# Altium PCB Slave_LHS.PcbDoc (part 1 of 3)
Units mil, origin at the board's own origin, x right, y up, seen from the top; angles counter-clockwise.
Board outline 6000 x 7620.08 mil, 4 copper layers (Top Layer, Int1 (GND), Int2 (PWR), Bottom Layer), stack 53.912 mil thick; 248 components, 191 nets, 688 pads, 143 vias.
Unrouted connection lines stored in the file: 218.
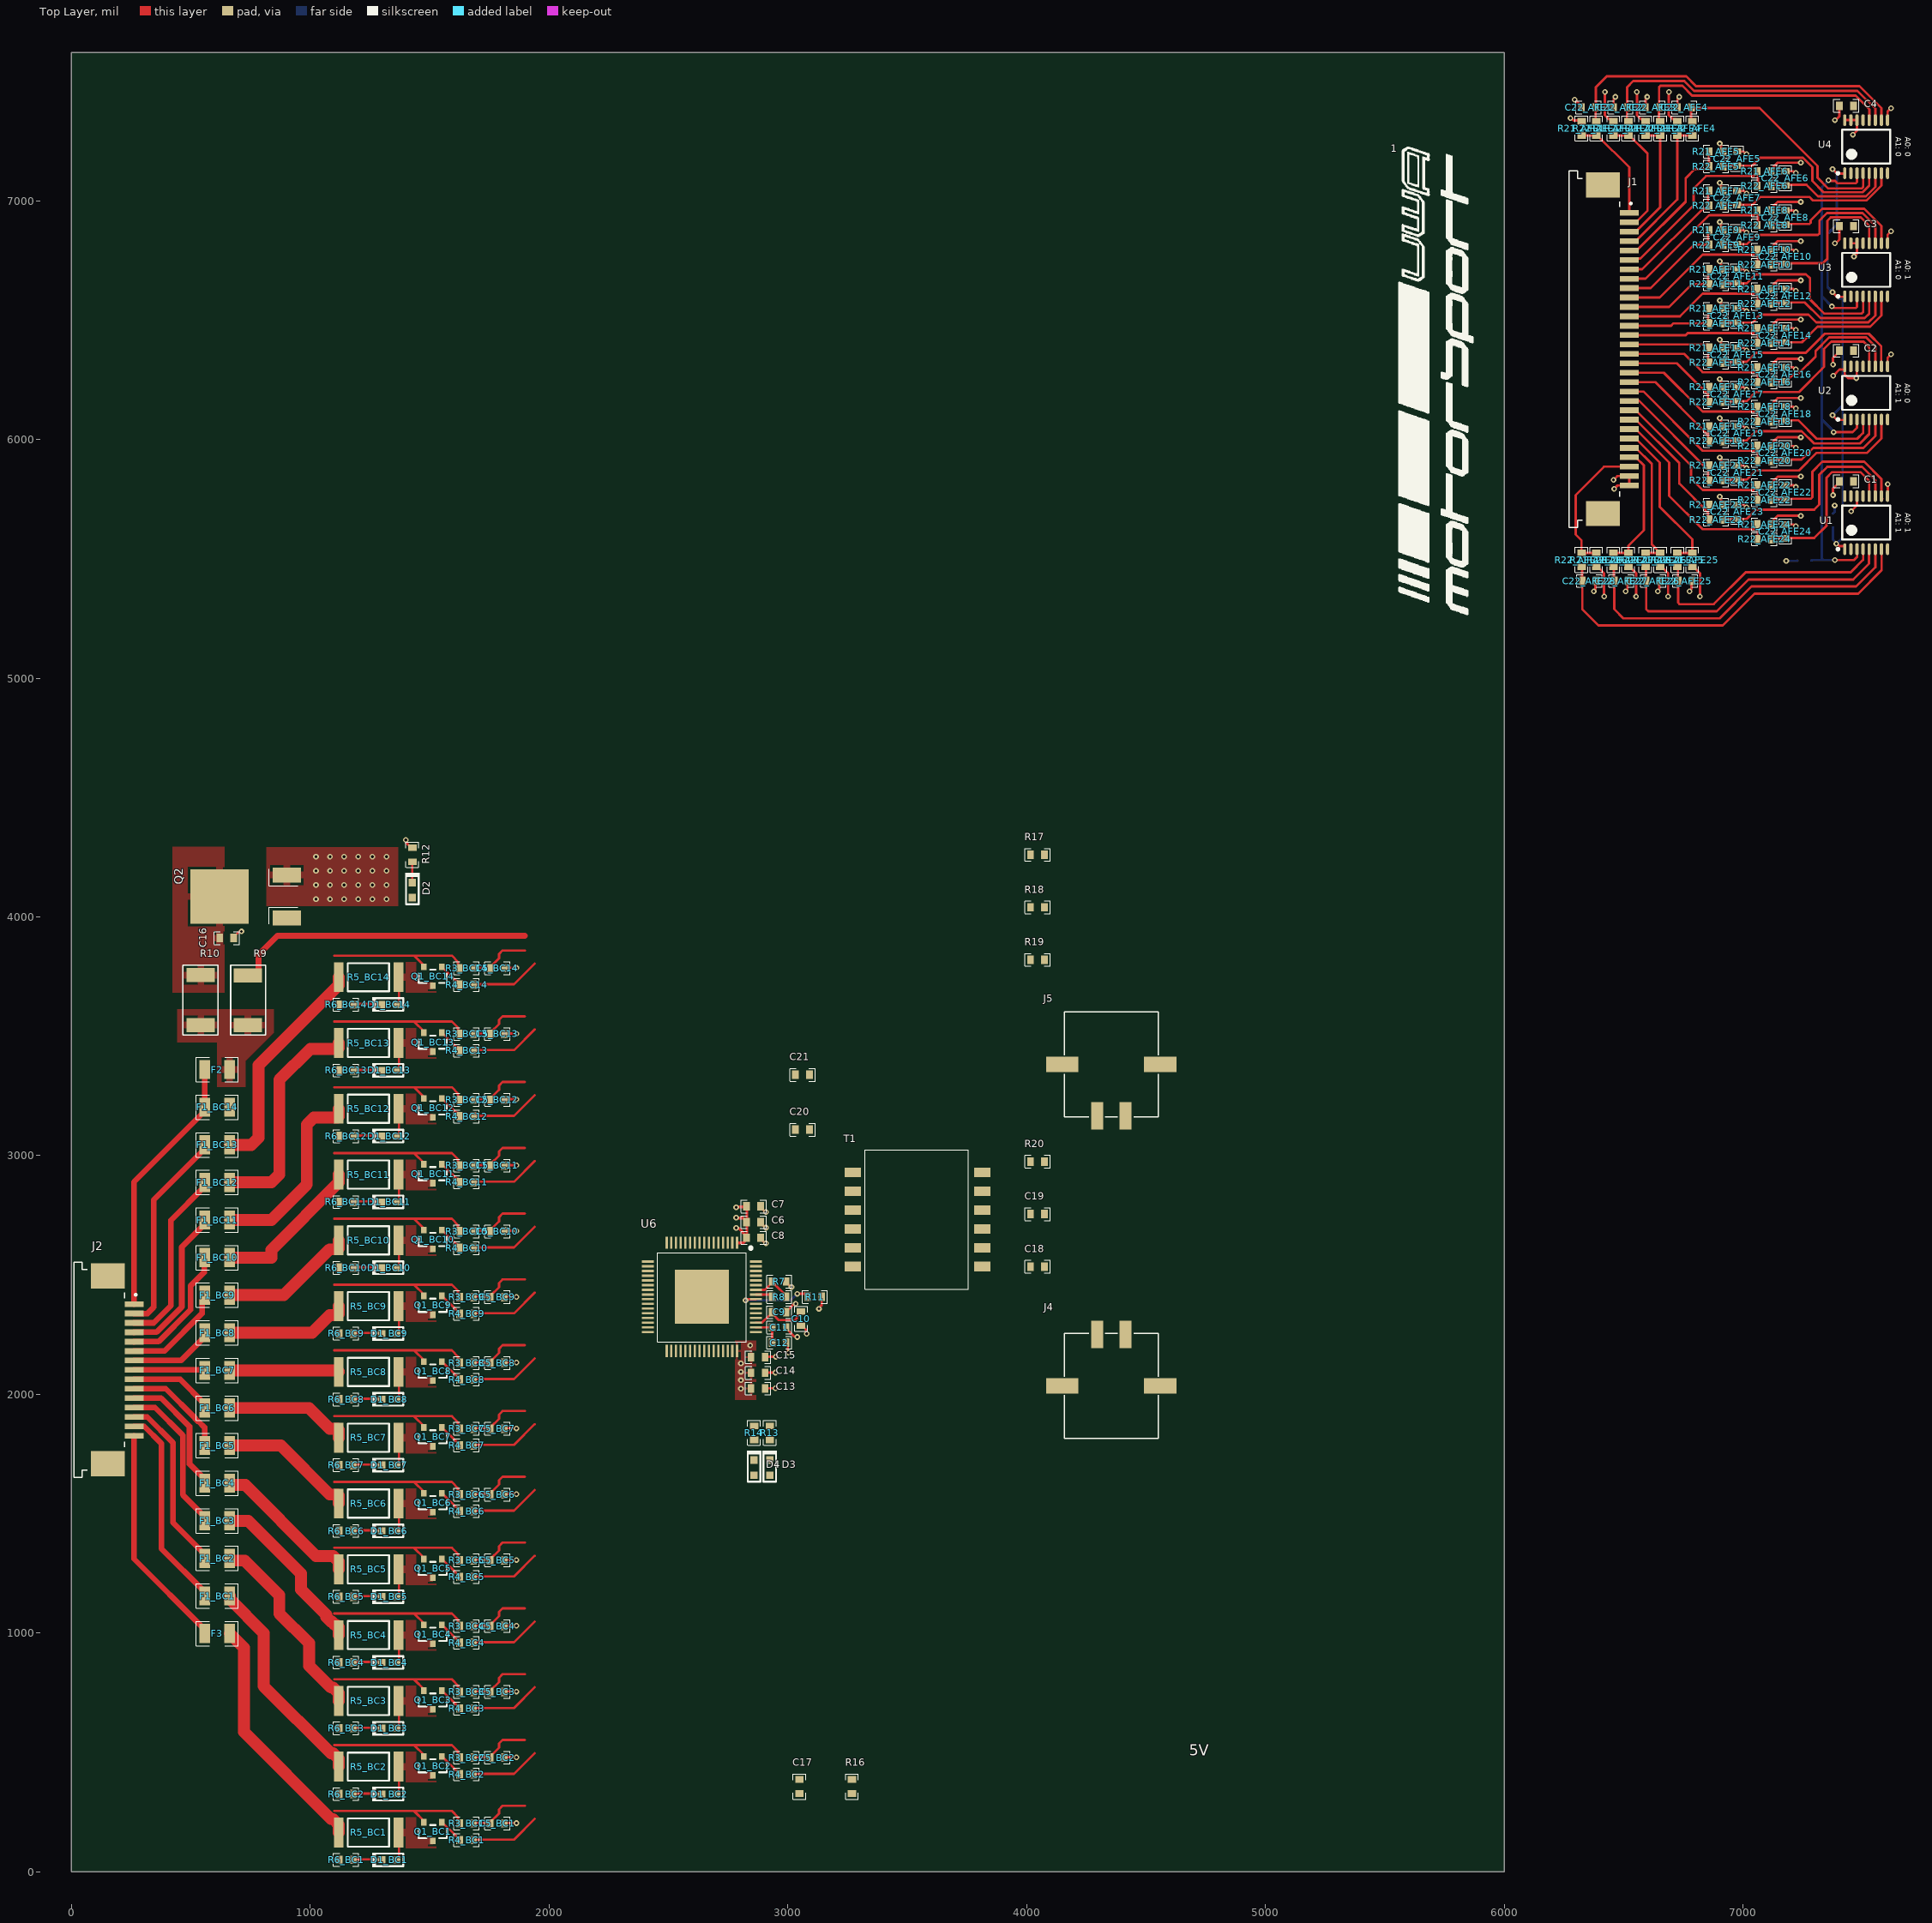
[diagram p0: Top Layer view]
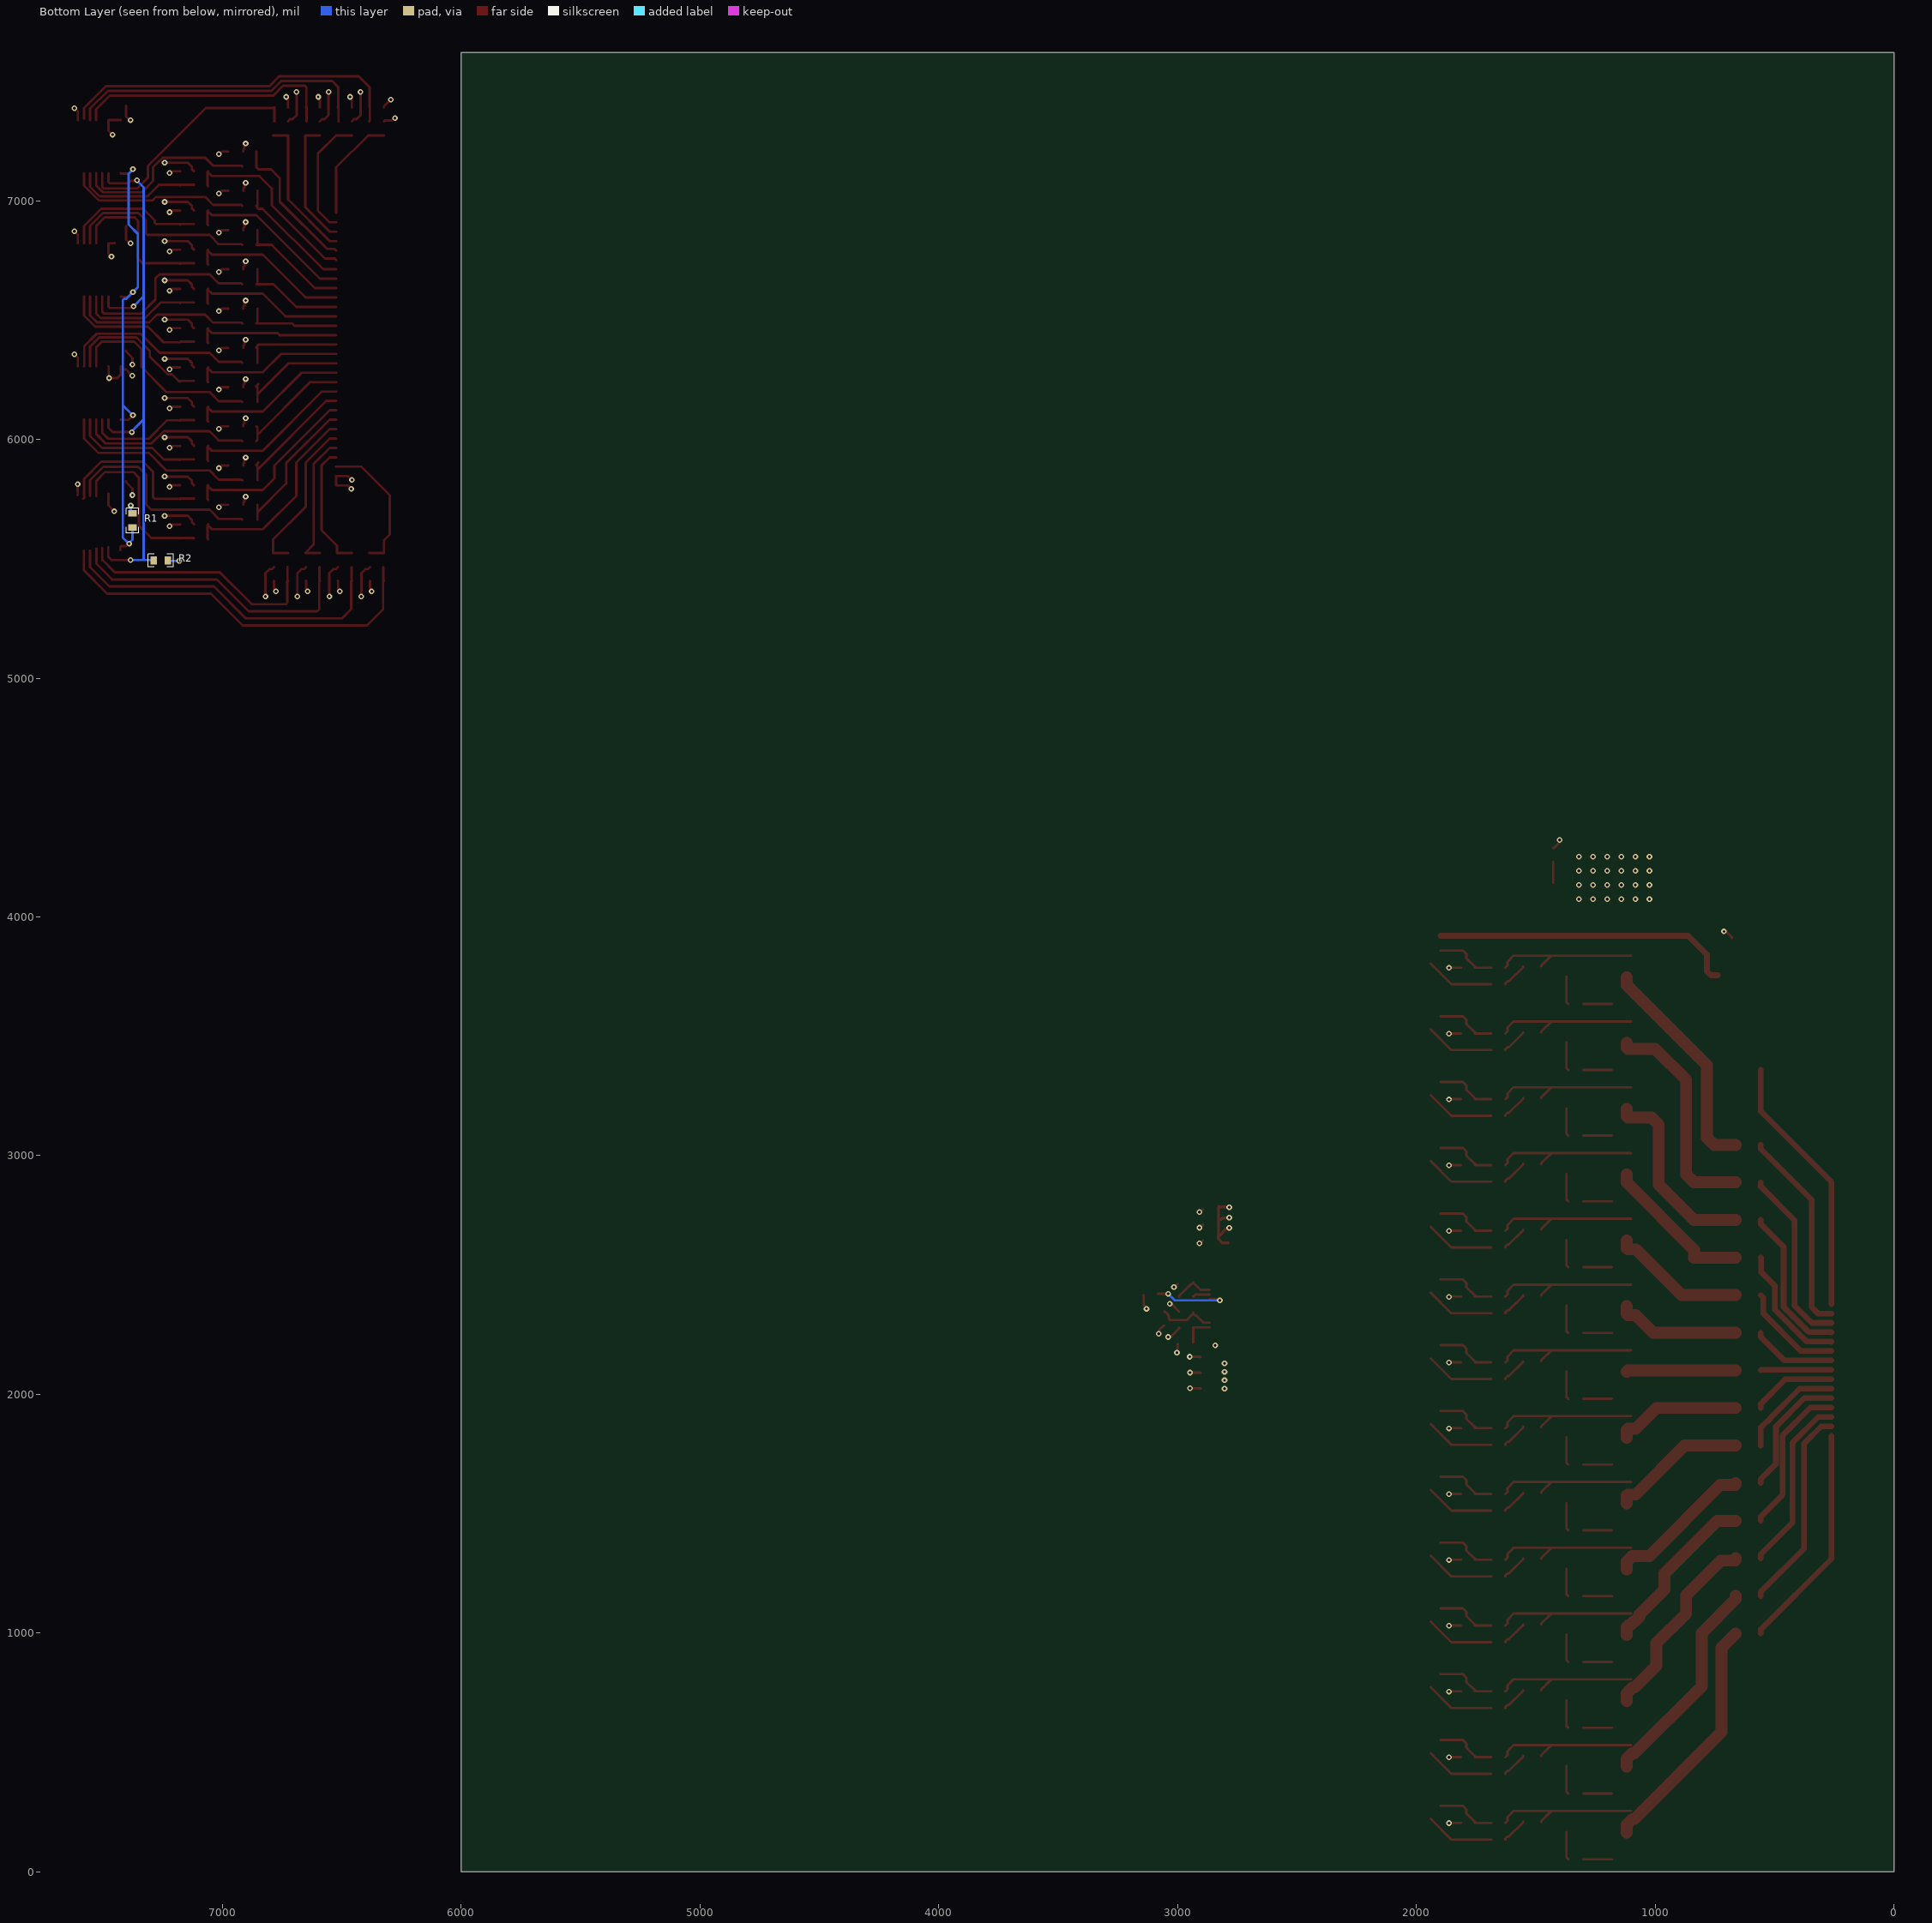
[diagram p1: Bottom Layer view, seen from below]

## Layer stack, top to bottom
Top Solder: solder mask 1, SM-001, Dk 4
Top Layer: signal copper 1.378
Dielectric 1: prepreg 5.1, PP-017, Dk 4.3
Dielectric 2: prepreg 5.1, PP-017, Dk 4.3
Int1 (GND): signal copper 1.378
Dielectric 3: core 28, Core-039, Dk 4.8
Int2 (PWR): signal copper 1.378
Dielectric 4: prepreg 5.1, PP-017, Dk 4.3
Dielectric 5: prepreg 5.1, PP-017, Dk 4.3
Bottom Layer: signal copper 1.378
Bottom Solder: solder mask 1, SM-001, Dk 4

## Board outline
0,0 6000,0 6000,7620.08 0,7620.08

## Design rules (kind name [scope] priority, off if disabled: settings)
BoardOutlineClearance [InNet('No Net')] p1: gap=11.81 ignorepadtopadclearanceinfootprint=FALSE except(0: Text-OutlineEdge Text-CavityEdge Text-CutoutEdge Text-SplitBarrior Text-SplitContinuation)
Clearance PTHTrace [IsTrack vs (OnLayer('Multi-Layer') AND IsPad)] p1: gap=12 ignorepadtopadclearanceinfootprint=FALSE // Prevent ion migration
Clearance GeneralClearance [All] p2: gap=4 ignorepadtopadclearanceinfootprint=FALSE
DiffPairsRouting [All] p1: maxlimit=10 minlimit=10 mostfreqgap=10 toplayer_minwidth=15 toplayer_maxwidth=15 toplayer_prefwidth=15 midlayer1_minwidth=15 midlayer1_maxwidth=15 midlayer1_prefwidth=15 midlayer2_minwidth=15 midlayer2_maxwidth=15 midlayer2_prefwidth=15 bottomlayer_minwidth=15 bottomlayer_maxwidth=15 bottomlayer_prefwidth=15 maxuncoupledlength=500
HoleSize [All] p1: absolutevalues=TRUE maxlimit=196.85 minlimit=11.81 maxpercent=80.000 minpercent=20.000
HoleSize ViaHole [IsVia] p2: absolutevalues=TRUE maxlimit=19.68 minlimit=11.81 maxpercent=80.000 minpercent=20.000
HoleToHoleClearance PTHClearance [(IsPad AND OnLayer('Multi-Layer'))] p1: gap=17.72 allowstackedmicrovias=TRUE
HoleToHoleClearance ViaToViaClearance [IsVia vs IsVia] p2: gap=11.81 allowstackedmicrovias=TRUE
MinimumAnnularRing Via [IsVia] p1: minimumring=3.94
MinimumSolderMaskSliver [All] p1: minsoldermaskwidth=13.78
PolygonConnect "High Current" [(InNetClass('BalanceNetClass') OR InNetClass('CB[14..1]') OR InNet('NetC16_2') OR InComponent('Q2') OR InComponent('F2') OR InComponent('F3') OR InNet('Vin'))] p1: thpad.connectstyle=Relief thpad.reliefconductorwidth=10 thpad.reliefentries=4 thpad.polygonreliefangle="90 Angle" thpad.airgapwidth=10 smdpad.connectstyle=Relief smdpad.reliefconductorwidth=29.53 smdpad.reliefentries=4 smdpad.polygonreliefangle="90 Angle" smdpad.airgapwidth=10 via.connectstyle=Relief via.reliefconductorwidth=10 via.reliefentries=4 via.polygonreliefangle="90 Angle" via.airgapwidth=10
PolygonConnect BasicPolyConnect [All] p2: thpad.connectstyle=Relief thpad.reliefconductorwidth=10 thpad.reliefentries=4 thpad.polygonreliefangle="90 Angle" thpad.airgapwidth=10 smdpad.connectstyle=Relief smdpad.reliefconductorwidth=10 smdpad.reliefentries=4 smdpad.polygonreliefangle="90 Angle" smdpad.airgapwidth=10 via.connectstyle=Direct via.reliefconductorwidth=10 via.reliefentries=4 via.polygonreliefangle="90 Angle" via.airgapwidth=10
RoutingVias [All] p1: holewidth=11.81 width=23.62 viastyle="Through Hole" minholewidth=11.81 minwidth=19.68 maxholewidth=23.62 maxwidth=39.37
SolderMaskExpansion [All] p1: expansion=4 istentingtop=FALSE
Width [All] p1: maxlimit=196.85 minlimit=4 preferedwidth=10
26 further rules are at their usual default settings.

## Classes and differential pairs
net class BalanceNetClass: CB1 CB2 CB3 CB4 CB5 CB6 CB7 CB8 CB9 CB10 CB11 CB12 CB13 CB14 HC2_BC1 HC2_BC2 HC2_BC3 HC2_BC4 HC2_BC5 HC2_BC6 HC2_BC7 HC2_BC8 HC2_BC9 HC2_BC10 HC2_BC11 HC2_BC12 HC2_BC13 HC2_BC14 Top14
differential pair class PRTB: PORTB
differential pair class PRTA: PORTA
differential pair class IB: IB
differential pair class IA: IA
channel class Balance_Circuit: BC1 BC2 BC3 BC4 BC5 BC6 BC7 BC8 BC9 BC10 BC11 BC12 BC13 BC14
channel class AFE: AFE1 AFE2 AFE3 AFE4 AFE5 AFE6 AFE7 AFE8 AFE9 AFE10 AFE11 AFE12 AFE13 AFE14 AFE15 AFE16 AFE17 AFE18 AFE19 AFE20 AFE21 AFE22 AFE23 AFE24 AFE25 AFE26 AFE27 AFE28
net class VTap[14..1]: VTap1 VTap2 VTap3 VTap4 VTap5 VTap6 VTap7 VTap8 VTap9 VTap10 VTap11 VTap12 VTap13 VTap14
net class Top[14..1]: CB2 CB3 CB4 CB5 CB6 CB7 CB8 CB9 CB10 CB11 CB12 CB13 CB14 Top14
net class S[14..1]: S1 S2 S3 S4 S5 S6 S7 S8 S9 S10 S11 S12 S13 S14
net class FPC[28..1]: FPC1 FPC2 FPC3 FPC4 FPC5 FPC6 FPC7 FPC8 FPC9 FPC10 FPC11 FPC12 FPC13 FPC14 FPC15 FPC16 FPC17 FPC18 FPC19 FPC20 FPC21 FPC22 FPC23 FPC24 FPC25 FPC26 FPC27 FPC28
net class CB[14..1]: CB1 CB2 CB3 CB4 CB5 CB6 CB7 CB8 CB9 CB10 CB11 CB12 CB13 CB14
net class C[14..1]: C1 C2 C3 C4 C5 C6 C7 C8 C9 C10 C11 C12 C13 C14
net class ADCIN[28..1]: ADCIN1 ADCIN2 ADCIN3 ADCIN4 ADCIN5 ADCIN6 ADCIN7 ADCIN8 ADCIN9 ADCIN10 ADCIN11 ADCIN12 ADCIN13 ADCIN14 ADCIN15 ADCIN16 ADCIN17 ADCIN18 ADCIN19 ADCIN20 ADCIN21 ADCIN22 ADCIN23 ADCIN24 ADCIN25 ADCIN26 ADCIN27 ADCIN28
component class Thermistor_ADC: C1 C2 C3 C4 J1 R1 R2 U1 U2 U3 U4
component class IsoSPI: C18 C19 C20 C21 J4 J5 R17 R18 R19 R20 T1
component class HV_BMS_Slave: 1 MH1 MH2 MH3 MH4 MH5 MH6 MH7 MH8
component class BMS_IC: C6 C7 C8 C9 C10 C11 C12 C13 C14 C15 C16 C17 D2 D3 D4 F2 F3 J2 Q2 R7 R8 R9 R10 R11 R12 R13 R14 R16 U6
component class BC14: C5_BC14 D1_BC14 F1_BC14 Q1_BC14 R3_BC14 R4_BC14 R5_BC14 R6_BC14
component class BC13: C5_BC13 D1_BC13 F1_BC13 Q1_BC13 R3_BC13 R4_BC13 R5_BC13 R6_BC13
component class BC12: C5_BC12 D1_BC12 F1_BC12 Q1_BC12 R3_BC12 R4_BC12 R5_BC12 R6_BC12
component class BC11: C5_BC11 D1_BC11 F1_BC11 Q1_BC11 R3_BC11 R4_BC11 R5_BC11 R6_BC11
component class BC10: C5_BC10 D1_BC10 F1_BC10 Q1_BC10 R3_BC10 R4_BC10 R5_BC10 R6_BC10
component class BC9: C5_BC9 D1_BC9 F1_BC9 Q1_BC9 R3_BC9 R4_BC9 R5_BC9 R6_BC9
component class BC8: C5_BC8 D1_BC8 F1_BC8 Q1_BC8 R3_BC8 R4_BC8 R5_BC8 R6_BC8
component class BC7: C5_BC7 D1_BC7 F1_BC7 Q1_BC7 R3_BC7 R4_BC7 R5_BC7 R6_BC7
component class BC6: C5_BC6 D1_BC6 F1_BC6 Q1_BC6 R3_BC6 R4_BC6 R5_BC6 R6_BC6
component class BC5: C5_BC5 D1_BC5 F1_BC5 Q1_BC5 R3_BC5 R4_BC5 R5_BC5 R6_BC5
component class BC4: C5_BC4 D1_BC4 F1_BC4 Q1_BC4 R3_BC4 R4_BC4 R5_BC4 R6_BC4
component class BC3: C5_BC3 D1_BC3 F1_BC3 Q1_BC3 R3_BC3 R4_BC3 R5_BC3 R6_BC3
component class BC2: C5_BC2 D1_BC2 F1_BC2 Q1_BC2 R3_BC2 R4_BC2 R5_BC2 R6_BC2
component class BC1: C5_BC1 D1_BC1 F1_BC1 Q1_BC1 R3_BC1 R4_BC1 R5_BC1 R6_BC1
component class AFE28: C22_AFE28 R21_AFE28 R22_AFE28
component class AFE27: C22_AFE27 R21_AFE27 R22_AFE27
component class AFE26: C22_AFE26 R21_AFE26 R22_AFE26
component class AFE25: C22_AFE25 R21_AFE25 R22_AFE25
component class AFE24: C22_AFE24 R21_AFE24 R22_AFE24
component class AFE23: C22_AFE23 R21_AFE23 R22_AFE23
component class AFE22: C22_AFE22 R21_AFE22 R22_AFE22
component class AFE21: C22_AFE21 R21_AFE21 R22_AFE21
component class AFE20: C22_AFE20 R21_AFE20 R22_AFE20
component class AFE19: C22_AFE19 R21_AFE19 R22_AFE19
component class AFE18: C22_AFE18 R21_AFE18 R22_AFE18
component class AFE17: C22_AFE17 R21_AFE17 R22_AFE17
component class AFE16: C22_AFE16 R21_AFE16 R22_AFE16
component class AFE15: C22_AFE15 R21_AFE15 R22_AFE15
component class AFE14: C22_AFE14 R21_AFE14 R22_AFE14
component class AFE13: C22_AFE13 R21_AFE13 R22_AFE13
component class AFE12: C22_AFE12 R21_AFE12 R22_AFE12
component class AFE11: C22_AFE11 R21_AFE11 R22_AFE11
component class AFE10: C22_AFE10 R21_AFE10 R22_AFE10
component class AFE9: C22_AFE9 R21_AFE9 R22_AFE9
component class AFE8: C22_AFE8 R21_AFE8 R22_AFE8
component class AFE7: C22_AFE7 R21_AFE7 R22_AFE7
component class AFE6: C22_AFE6 R21_AFE6 R22_AFE6
component class AFE5: C22_AFE5 R21_AFE5 R22_AFE5
component class AFE4: C22_AFE4 R21_AFE4 R22_AFE4
component class AFE3: C22_AFE3 R21_AFE3 R22_AFE3
component class AFE2: C22_AFE2 R21_AFE2 R22_AFE2
component class AFE1: C22_AFE1 R21_AFE1 R22_AFE1
differential pair PORTB: +PORTB_P -PORTB_N
differential pair PORTA: +PORTA_P -PORTA_N
differential pair IB: +IB_P -IB_N
differential pair IA: +IA_P -IA_N

## Components (designator, comment, footprint, x,y, rotation, side; value= is the part's Value field where it differs from the comment)
1 "UWAM Logo" "UWAM Logo" 5639.76,6210.63 r90 top
C1 "C" C_0603 7403.54,5824.8 r0 top value=0.1uF
C2 "C" C_0603 7403.54,6372.05 r0 top value=0.1uF
C3 "C" C_0603 7403.54,6893.7 r0 top value=0.1uF
C4 "C" C_0603 7403.54,7397.64 r0 top value=0.1uF
C5_BC1 "C" C_0603 1812.01,202.76 r180 top value=10nF (schematic designator C5)
C5_BC2 "C" C_0603 1812.01,478.35 r180 top value=10nF (schematic designator C5)
C5_BC3 "C" C_0603 1812.01,753.94 r180 top value=10nF (schematic designator C5)
C5_BC4 "C" C_0603 1812.01,1029.53 r180 top value=10nF (schematic designator C5)
C5_BC5 "C" C_0603 1812.01,1305.12 r180 top value=10nF (schematic designator C5)
C5_BC6 "C" C_0603 1812.01,1580.71 r180 top value=10nF (schematic designator C5)
C5_BC7 "C" C_0603 1812.01,1856.3 r180 top value=10nF (schematic designator C5)
C5_BC8 "C" C_0603 1812.01,2131.89 r180 top value=10nF (schematic designator C5)
C5_BC9 "C" C_0603 1812.01,2407.48 r180 top value=10nF (schematic designator C5)
C5_BC10 "C" C_0603 1812.01,2683.07 r180 top value=10nF (schematic designator C5)
C5_BC11 "C" C_0603 1812.01,2958.66 r180 top value=10nF (schematic designator C5)
C5_BC12 "C" C_0603 1812.01,3234.25 r180 top value=10nF (schematic designator C5)
C5_BC13 "C" C_0603 1812.01,3509.84 r180 top value=10nF (schematic designator C5)
C5_BC14 "C" C_0603 1812.01,3785.43 r180 top value=10nF (schematic designator C5)
C6 "C" C_0603 2885.83,2721.5 r180 top value=4.7uF
C7 "C" C_0603 2885.83,2787.4 r180 top value=100nF
C8 "C" C_0603 2885.83,2655.59 r180 top value=10uF
C9 "C" C_0603 2993.11,2344.49 r180 top value=1uF
C10 "C" C_0603 3055.12,2287.4 r90 top value=100nF
C11 "C" C_0603 2993.11,2280.51 r180 top value=1uF
C12 "C" C_0603 2993.11,2216.54 r180 top value=100nF
C13 "C" C_0603 2904.45,2024.68 r180 top value=10uF
C14 "C" C_0603 2904.45,2090.14 r180 top value=4.7uF
C15 "C" C_0603 2904.45,2155.59 r180 top value=100nF
C16 "C" C_0603 679.13,3911.42 r180 top value=1uF
C17 "C" C_0603 3048.54,327.83 r90 top value=10nF
C18 "C" C_0603 4074.8,2535.04 r180 top value=10nF
C19 "C" C_0603 4074.8,2755.04 r180 top value=10nF
C20 "C" C_0603 3090.55,3108.58 r180 top value=10nF
C21 "C" C_0603 3090.55,3338.58 r180 top value=10nF
C22_AFE1 "C" C_0603 6323.82,7390.75 r0 top value=10nF (schematic designator C22)
C22_AFE2 "C" C_0603 6457.68,7390.75 r0 top value=10nF (schematic designator C22)
C22_AFE3 "C" C_0603 6591.54,7390.75 r0 top value=10nF (schematic designator C22)
C22_AFE4 "C" C_0603 6725.39,7390.75 r0 top value=10nF (schematic designator C22)
C22_AFE5 "C" C_0603 6975.39,7205.71 r270 top value=10nF (schematic designator C22)
C22_AFE6 "C" C_0603 7177.17,7123.52 r270 top value=10nF (schematic designator C22)
C22_AFE7 "C" C_0603 6975.39,7041.34 r270 top value=10nF (schematic designator C22)
C22_AFE8 "C" C_0603 7177.17,6959.15 r270 top value=10nF (schematic designator C22)
C22_AFE9 "C" C_0603 6975.39,6876.97 r270 top value=10nF (schematic designator C22)
C22_AFE10 "C" C_0603 7177.17,6794.78 r270 top value=10nF (schematic designator C22)
C22_AFE11 "C" C_0603 6975.39,6712.6 r270 top value=10nF (schematic designator C22)
C22_AFE12 "C" C_0603 7177.17,6630.41 r270 top value=10nF (schematic designator C22)
C22_AFE13 "C" C_0603 6975.39,6548.23 r270 top value=10nF (schematic designator C22)
C22_AFE14 "C" C_0603 7177.17,6466.04 r270 top value=10nF (schematic designator C22)
C22_AFE15 "C" C_0603 6975.39,6383.86 r270 top value=10nF (schematic designator C22)
C22_AFE16 "C" C_0603 7177.17,6301.67 r270 top value=10nF (schematic designator C22)
C22_AFE17 "C" C_0603 6975.39,6219.49 r270 top value=10nF (schematic designator C22)
C22_AFE18 "C" C_0603 7177.17,6137.3 r270 top value=10nF (schematic designator C22)
C22_AFE19 "C" C_0603 6975.39,6055.12 r270 top value=10nF (schematic designator C22)
C22_AFE20 "C" C_0603 7177.17,5972.93 r270 top value=10nF (schematic designator C22)
C22_AFE21 "C" C_0603 6975.39,5890.75 r270 top value=10nF (schematic designator C22)
C22_AFE22 "C" C_0603 7177.17,5808.56 r270 top value=10nF (schematic designator C22)
C22_AFE23 "C" C_0603 6975.39,5726.38 r270 top value=10nF (schematic designator C22)
C22_AFE24 "C" C_0603 7177.17,5644.19 r270 top value=10nF (schematic designator C22)
C22_AFE25 "C" C_0603 6787.4,5407.48 r180 top value=10nF (schematic designator C22)
C22_AFE26 "C" C_0603 6653.54,5407.48 r180 top value=10nF (schematic designator C22)
C22_AFE27 "C" C_0603 6519.69,5407.48 r180 top value=10nF (schematic designator C22)
C22_AFE28 "C" C_0603 6385.83,5407.48 r180 top value=10nF (schematic designator C22)
D1_BC1 "150060BS55040" "LED (0603)" 1330.2,50.2 r0 top (schematic designator D1)
D1_BC2 "150060BS55040" "LED (0603)" 1330.2,325.79 r0 top (schematic designator D1)
D1_BC3 "150060BS55040" "LED (0603)" 1330.2,601.38 r0 top (schematic designator D1)
D1_BC4 "150060BS55040" "LED (0603)" 1330.2,876.97 r0 top (schematic designator D1)
D1_BC5 "150060BS55040" "LED (0603)" 1330.2,1152.56 r0 top (schematic designator D1)
D1_BC6 "150060BS55040" "LED (0603)" 1330.2,1428.15 r0 top (schematic designator D1)
D1_BC7 "150060BS55040" "LED (0603)" 1330.2,1703.74 r0 top (schematic designator D1)
D1_BC8 "150060BS55040" "LED (0603)" 1330.2,1979.33 r0 top (schematic designator D1)
D1_BC9 "150060BS55040" "LED (0603)" 1330.2,2254.92 r0 top (schematic designator D1)
D1_BC10 "150060BS55040" "LED (0603)" 1330.2,2530.51 r0 top (schematic designator D1)
D1_BC11 "150060BS55040" "LED (0603)" 1330.2,2806.1 r0 top (schematic designator D1)
D1_BC12 "150060BS55040" "LED (0603)" 1330.2,3081.69 r0 top (schematic designator D1)
D1_BC13 "150060BS55040" "LED (0603)" 1330.2,3357.28 r0 top (schematic designator D1)
D1_BC14 "150060BS55040" "LED (0603)" 1330.2,3632.87 r0 top (schematic designator D1)
D2 "150060SS55040" "LED (0603)" 1427.17,4112.2 r270 top
D3 "150060BS55040" "LED (0603)" 2924.21,1692.91 r270 top
D4 "150060GS55040" "LED (0603)" 2858.27,1692.91 r270 top
F1_BC1 "0466.500NR" 0466.500NR 557.09,1155.51 r270 top (schematic designator F1)
F1_BC2 "0466.500NR" 0466.500NR 557.09,1312.99 r270 top (schematic designator F1)
F1_BC3 "0466.500NR" 0466.500NR 557.09,1470.47 r270 top (schematic designator F1)
F1_BC4 "0466.500NR" 0466.500NR 557.09,1627.95 r270 top (schematic designator F1)
F1_BC5 "0466.500NR" 0466.500NR 557.09,1785.43 r270 top (schematic designator F1)
F1_BC6 "0466.500NR" 0466.500NR 557.09,1942.91 r270 top (schematic designator F1)
F1_BC7 "0466.500NR" 0466.500NR 557.09,2100.39 r270 top (schematic designator F1)
F1_BC8 "0466.500NR" 0466.500NR 557.09,2257.87 r270 top (schematic designator F1)
F1_BC9 "0466.500NR" 0466.500NR 557.09,2415.35 r270 top (schematic designator F1)
F1_BC10 "0466.500NR" 0466.500NR 557.09,2572.83 r270 top (schematic designator F1)
F1_BC11 "0466.500NR" 0466.500NR 557.09,2730.31 r270 top (schematic designator F1)
F1_BC12 "0466.500NR" 0466.500NR 557.09,2887.8 r270 top (schematic designator F1)
F1_BC13 "0466.500NR" 0466.500NR 557.09,3045.28 r270 top (schematic designator F1)
F1_BC14 "0466.500NR" 0466.500NR 557.09,3202.76 r270 top (schematic designator F1)
F2 "0466.500NR" 0466.500NR 557.09,3360.24 r270 top
F3 "0466.500NR" 0466.500NR 557.09,998.03 r270 top
J1 "3-84953-0" 3-84953-0 6523.62,6377.95 r270 top
J2 "1-84953-5" 1-84953-5 261.81,2102.36 r270 top
J4 "2-1445057-2" TE_2-1445057-2 4354.33,2035.43 r0 top
J5 "2-1445057-2" TE_2-1445057-2 4354.33,3381.89 r180 top
Q1_BC1 "NX2301P,215" FP-SOT23-MFG 1512.8,168.31 r270 top (schematic designator Q1)
Q1_BC2 "NX2301P,215" FP-SOT23-MFG 1512.8,443.9 r270 top (schematic designator Q1)
Q1_BC3 "NX2301P,215" FP-SOT23-MFG 1512.8,719.49 r270 top (schematic designator Q1)
Q1_BC4 "NX2301P,215" FP-SOT23-MFG 1512.8,995.08 r270 top (schematic designator Q1)
Q1_BC5 "NX2301P,215" FP-SOT23-MFG 1512.8,1270.67 r270 top (schematic designator Q1)
Q1_BC6 "NX2301P,215" FP-SOT23-MFG 1512.8,1546.26 r270 top (schematic designator Q1)
Q1_BC7 "NX2301P,215" FP-SOT23-MFG 1512.8,1821.85 r270 top (schematic designator Q1)
Q1_BC8 "NX2301P,215" FP-SOT23-MFG 1512.8,2097.44 r270 top (schematic designator Q1)
Q1_BC9 "NX2301P,215" FP-SOT23-MFG 1512.8,2373.03 r270 top (schematic designator Q1)
Q1_BC10 "NX2301P,215" FP-SOT23-MFG 1512.8,2648.62 r270 top (schematic designator Q1)
Q1_BC11 "NX2301P,215" FP-SOT23-MFG 1512.8,2924.21 r270 top (schematic designator Q1)
Q1_BC12 "NX2301P,215" FP-SOT23-MFG 1512.8,3199.8 r270 top (schematic designator Q1)
Q1_BC13 "NX2301P,215" FP-SOT23-MFG 1512.8,3475.39 r270 top (schematic designator Q1)
Q1_BC14 "NX2301P,215" FP-SOT23-MFG 1512.8,3750.98 r270 top (schematic designator Q1)
Q2 "MJD340G" TO-252-3 901.77,3995.67 r0 top
R1 "Resistor" R-0603 7376.97,5630.91 r90 bottom value=2k
R2 "Resistor" R-0603 7287.4,5493.11 r180 bottom value=2k
R3_BC1 "Resistor" R-0603 1625,202.76 r0 top value=100 (schematic designator R3)
R3_BC2 "Resistor" R-0603 1625,478.35 r0 top value=100 (schematic designator R3)
R3_BC3 "Resistor" R-0603 1625,753.94 r0 top value=100 (schematic designator R3)
R3_BC4 "Resistor" R-0603 1625,1029.53 r0 top value=100 (schematic designator R3)
R3_BC5 "Resistor" R-0603 1625,1305.12 r0 top value=100 (schematic designator R3)
R3_BC6 "Resistor" R-0603 1625,1580.71 r0 top value=100 (schematic designator R3)
R3_BC7 "Resistor" R-0603 1625,1856.3 r0 top value=100 (schematic designator R3)
R3_BC8 "Resistor" R-0603 1625,2131.89 r0 top value=100 (schematic designator R3)
R3_BC9 "Resistor" R-0603 1625,2407.48 r0 top value=100 (schematic designator R3)
R3_BC10 "Resistor" R-0603 1625,2683.07 r0 top value=100 (schematic designator R3)
R3_BC11 "Resistor" R-0603 1625,2958.66 r0 top value=100 (schematic designator R3)
R3_BC12 "Resistor" R-0603 1625,3234.25 r0 top value=100 (schematic designator R3)
R3_BC13 "Resistor" R-0603 1625,3509.84 r0 top value=100 (schematic designator R3)
R3_BC14 "Resistor" R-0603 1625,3785.43 r0 top value=100 (schematic designator R3)
R4_BC1 "Resistor" R-0603 1625,132.87 r0 top value=3k3 (schematic designator R4)
R4_BC2 "Resistor" R-0603 1625,408.46 r0 top value=3k3 (schematic designator R4)
R4_BC3 "Resistor" R-0603 1625,684.06 r0 top value=3k3 (schematic designator R4)
R4_BC4 "Resistor" R-0603 1625,959.65 r0 top value=3k3 (schematic designator R4)
R4_BC5 "Resistor" R-0603 1625,1235.24 r0 top value=3k3 (schematic designator R4)
R4_BC6 "Resistor" R-0603 1625,1510.83 r0 top value=3k3 (schematic designator R4)
R4_BC7 "Resistor" R-0603 1625,1786.42 r0 top value=3k3 (schematic designator R4)
R4_BC8 "Resistor" R-0603 1625,2062.01 r0 top value=3k3 (schematic designator R4)
R4_BC9 "Resistor" R-0603 1625,2337.6 r0 top value=3k3 (schematic designator R4)
R4_BC10 "Resistor" R-0603 1625,2613.19 r0 top value=3k3 (schematic designator R4)
R4_BC11 "Resistor" R-0603 1625,2888.78 r0 top value=3k3 (schematic designator R4)
R4_BC12 "Resistor" R-0603 1625,3164.37 r0 top value=3k3 (schematic designator R4)
R4_BC13 "Resistor" R-0603 1625,3439.96 r0 top value=3k3 (schematic designator R4)
R4_BC14 "Resistor" R-0603 1625,3715.55 r0 top value=3k3 (schematic designator R4)
R5_BC1 "CRCW251221R0FKEGHP" R_2512 1369.09,164.68 r180 top value=21 (schematic designator R5)
R5_BC2 "CRCW251221R0FKEGHP" R_2512 1369.09,440.28 r180 top value=21 (schematic designator R5)
R5_BC3 "CRCW251221R0FKEGHP" R_2512 1369.09,715.87 r180 top value=21 (schematic designator R5)
R5_BC4 "CRCW251221R0FKEGHP" R_2512 1369.09,991.46 r180 top value=21 (schematic designator R5)
R5_BC5 "CRCW251221R0FKEGHP" R_2512 1369.09,1267.05 r180 top value=21 (schematic designator R5)
R5_BC6 "CRCW251221R0FKEGHP" R_2512 1369.09,1542.64 r180 top value=21 (schematic designator R5)
R5_BC7 "CRCW251221R0FKEGHP" R_2512 1369.09,1818.23 r180 top value=21 (schematic designator R5)
R5_BC8 "CRCW251221R0FKEGHP" R_2512 1369.09,2093.82 r180 top value=21 (schematic designator R5)
R5_BC9 "CRCW251221R0FKEGHP" R_2512 1369.09,2369.41 r180 top value=21 (schematic designator R5)
R5_BC10 "CRCW251221R0FKEGHP" R_2512 1369.09,2645 r180 top value=21 (schematic designator R5)
R5_BC11 "CRCW251221R0FKEGHP" R_2512 1369.09,2920.59 r180 top value=21 (schematic designator R5)
R5_BC12 "CRCW251221R0FKEGHP" R_2512 1369.09,3196.18 r180 top value=21 (schematic designator R5)
R5_BC13 "CRCW251221R0FKEGHP" R_2512 1369.09,3471.77 r180 top value=21 (schematic designator R5)
R5_BC14 "CRCW251221R0FKEGHP" R_2512 1369.09,3747.36 r180 top value=21 (schematic designator R5)
R6_BC1 "RT0603DRE07583RL" R-0603 1120.59,50.2 r0 top value=583 (schematic designator R6)
R6_BC2 "RT0603DRE07583RL" R-0603 1120.59,325.79 r0 top value=583 (schematic designator R6)
R6_BC3 "RT0603DRE07583RL" R-0603 1120.59,601.38 r0 top value=583 (schematic designator R6)
R6_BC4 "RT0603DRE07583RL" R-0603 1120.59,876.97 r0 top value=583 (schematic designator R6)
R6_BC5 "RT0603DRE07583RL" R-0603 1120.59,1152.56 r0 top value=583 (schematic designator R6)
R6_BC6 "RT0603DRE07583RL" R-0603 1120.59,1428.15 r0 top value=583 (schematic designator R6)
R6_BC7 "RT0603DRE07583RL" R-0603 1120.59,1703.74 r0 top value=583 (schematic designator R6)
R6_BC8 "RT0603DRE07583RL" R-0603 1120.59,1979.33 r0 top value=583 (schematic designator R6)
R6_BC9 "RT0603DRE07583RL" R-0603 1120.59,2254.92 r0 top value=583 (schematic designator R6)
R6_BC10 "RT0603DRE07583RL" R-0603 1120.59,2530.51 r0 top value=583 (schematic designator R6)
R6_BC11 "RT0603DRE07583RL" R-0603 1120.59,2806.1 r0 top value=583 (schematic designator R6)
R6_BC12 "RT0603DRE07583RL" R-0603 1120.59,3081.69 r0 top value=583 (schematic designator R6)
R6_BC13 "RT0603DRE07583RL" R-0603 1120.59,3357.28 r0 top value=583 (schematic designator R6)
R6_BC14 "RT0603DRE07583RL" R-0603 1120.59,3632.87 r0 top value=583 (schematic designator R6)
R7 "Resistor" R-0603 2993.11,2472.44 r180 top value=1.21k
R8 "RB1" R-0603 2993.11,2408.46 r180 top value=2.8k
R9 "ERJ-12ZYJ101U" R_2010 738.19,3650.59 r90 top value=100
R10 "ERJ-12ZYJ101U" R_2010 541.34,3651.57 r270 top value=100
R11 "Resistor" R-0603 3141.73,2408.46 r180 top value=1M
R12 "Resistor" R-0603 1427.17,4289.37 r270 top value=1k
R13 "Resistor" R-0603 2924.22,1868.11 r270 top value=1k
R14 "Resistor" R-0603 2858.27,1868.11 r270 top value=1k
R16 "Resistor" R-0603 3268.54,327.83 r90 top value=100
R17 "Resistor" R-0603 4074.8,4260.04 r180 top value=51
R18 "Resistor" R-0603 4074.8,4040.04 r180 top value=51
R19 "Resistor" R-0603 4074.8,3820.04 r180 top value=51
R20 "Resistor" R-0603 4074.8,2975.04 r180 top value=51
R21_AFE1 "CRT0603-BY-1002EST" R-0603 6323.82,7273.62 r90 top value=10k (schematic designator R21)
R21_AFE2 "CRT0603-BY-1002EST" R-0603 6457.68,7273.62 r90 top value=10k (schematic designator R21)
R21_AFE3 "CRT0603-BY-1002EST" R-0603 6591.54,7273.62 r90 top value=10k (schematic designator R21)
R21_AFE4 "CRT0603-BY-1002EST" R-0603 6725.39,7273.62 r90 top value=10k (schematic designator R21)
R21_AFE5 "CRT0603-BY-1002EST" R-0603 6858.27,7205.71 r0 top value=10k (schematic designator R21)
R21_AFE6 "CRT0603-BY-1002EST" R-0603 7060.04,7123.52 r0 top value=10k (schematic designator R21)
R21_AFE7 "CRT0603-BY-1002EST" R-0603 6858.27,7041.34 r0 top value=10k (schematic designator R21)
R21_AFE8 "CRT0603-BY-1002EST" R-0603 7060.04,6959.15 r0 top value=10k (schematic designator R21)
R21_AFE9 "CRT0603-BY-1002EST" R-0603 6858.27,6876.97 r0 top value=10k (schematic designator R21)
R21_AFE10 "CRT0603-BY-1002EST" R-0603 7060.04,6794.78 r0 top value=10k (schematic designator R21)
R21_AFE11 "CRT0603-BY-1002EST" R-0603 6858.27,6712.6 r0 top value=10k (schematic designator R21)
R21_AFE12 "CRT0603-BY-1002EST" R-0603 7060.04,6630.41 r0 top value=10k (schematic designator R21)
R21_AFE13 "CRT0603-BY-1002EST" R-0603 6858.27,6548.23 r0 top value=10k (schematic designator R21)
R21_AFE14 "CRT0603-BY-1002EST" R-0603 7060.04,6466.04 r0 top value=10k (schematic designator R21)
R21_AFE15 "CRT0603-BY-1002EST" R-0603 6858.27,6383.86 r0 top value=10k (schematic designator R21)
R21_AFE16 "CRT0603-BY-1002EST" R-0603 7060.04,6301.67 r0 top value=10k (schematic designator R21)
R21_AFE17 "CRT0603-BY-1002EST" R-0603 6858.27,6219.49 r0 top value=10k (schematic designator R21)
R21_AFE18 "CRT0603-BY-1002EST" R-0603 7060.04,6137.3 r0 top value=10k (schematic designator R21)
R21_AFE19 "CRT0603-BY-1002EST" R-0603 6858.27,6055.12 r0 top value=10k (schematic designator R21)
R21_AFE20 "CRT0603-BY-1002EST" R-0603 7060.04,5972.93 r0 top value=10k (schematic designator R21)
R21_AFE21 "CRT0603-BY-1002EST" R-0603 6858.27,5890.75 r0 top value=10k (schematic designator R21)
R21_AFE22 "CRT0603-BY-1002EST" R-0603 7060.04,5808.56 r0 top value=10k (schematic designator R21)
R21_AFE23 "CRT0603-BY-1002EST" R-0603 6858.27,5726.38 r0 top value=10k (schematic designator R21)
R21_AFE24 "CRT0603-BY-1002EST" R-0603 7060.04,5644.19 r0 top value=10k (schematic designator R21)
R21_AFE25 "CRT0603-BY-1002EST" R-0603 6787.4,5524.61 r270 top value=10k (schematic designator R21)
R21_AFE26 "CRT0603-BY-1002EST" R-0603 6653.54,5524.61 r270 top value=10k (schematic designator R21)
R21_AFE27 "CRT0603-BY-1002EST" R-0603 6519.69,5524.61 r270 top value=10k (schematic designator R21)
R21_AFE28 "CRT0603-BY-1002EST" R-0603 6385.83,5524.61 r270 top value=10k (schematic designator R21)
R22_AFE1 "Resistor" R-0603 6385.83,7273.62 r90 top value=100 (schematic designator R22)
R22_AFE2 "Resistor" R-0603 6519.69,7273.62 r90 top value=100 (schematic designator R22)
R22_AFE3 "Resistor" R-0603 6653.54,7273.62 r90 top value=100 (schematic designator R22)
R22_AFE4 "Resistor" R-0603 6787.4,7273.62 r90 top value=100 (schematic designator R22)
R22_AFE5 "Resistor" R-0603 6858.27,7143.7 r0 top value=100 (schematic designator R22)
R22_AFE6 "Resistor" R-0603 7060.04,7061.52 r0 top value=100 (schematic designator R22)
R22_AFE7 "Resistor" R-0603 6858.27,6979.33 r0 top value=100 (schematic designator R22)
R22_AFE8 "Resistor" R-0603 7060.04,6897.15 r0 top value=100 (schematic designator R22)
R22_AFE9 "Resistor" R-0603 6858.27,6814.96 r0 top value=100 (schematic designator R22)
R22_AFE10 "Resistor" R-0603 7060.04,6732.78 r0 top value=100 (schematic designator R22)
R22_AFE11 "Resistor" R-0603 6858.27,6650.59 r0 top value=100 (schematic designator R22)
R22_AFE12 "Resistor" R-0603 7060.04,6568.41 r0 top value=100 (schematic designator R22)
R22_AFE13 "Resistor" R-0603 6858.27,6486.22 r0 top value=100 (schematic designator R22)
R22_AFE14 "Resistor" R-0603 7060.04,6404.04 r0 top value=100 (schematic designator R22)
R22_AFE15 "Resistor" R-0603 6858.27,6321.85 r0 top value=100 (schematic designator R22)
R22_AFE16 "Resistor" R-0603 7060.04,6239.67 r0 top value=100 (schematic designator R22)
R22_AFE17 "Resistor" R-0603 6858.27,6157.48 r0 top value=100 (schematic designator R22)
R22_AFE18 "Resistor" R-0603 7060.04,6075.3 r0 top value=100 (schematic designator R22)
R22_AFE19 "Resistor" R-0603 6858.27,5993.11 r0 top value=100 (schematic designator R22)
R22_AFE20 "Resistor" R-0603 7060.04,5910.93 r0 top value=100 (schematic designator R22)
R22_AFE21 "Resistor" R-0603 6858.27,5828.74 r0 top value=100 (schematic designator R22)
R22_AFE22 "Resistor" R-0603 7060.04,5746.56 r0 top value=100 (schematic designator R22)
R22_AFE23 "Resistor" R-0603 6858.27,5664.37 r0 top value=100 (schematic designator R22)
R22_AFE24 "Resistor" R-0603 7060.04,5582.18 r0 top value=100 (schematic designator R22)
R22_AFE25 "Resistor" R-0603 6725.39,5524.61 r270 top value=100 (schematic designator R22)
R22_AFE26 "Resistor" R-0603 6591.54,5524.61 r270 top value=100 (schematic designator R22)
R22_AFE27 "Resistor" R-0603 6457.68,5524.61 r270 top value=100 (schematic designator R22)
R22_AFE28 "Resistor" R-0603 6323.82,5524.61 r270 top value=100 (schematic designator R22)
T1 "SM91501ALE" SM91501ALE 3814.37,2535.43 r90 top
U1 "ADG728" ADG728 7515.75,5651.57 r90 top
U2 "ADG728" ADG728 7515.75,6194.88 r90 top
U3 "ADG728" ADG728 7515.75,6710.63 r90 top
U4 "ADG728" ADG728 7515.75,7226.38 r90 top
U6 "LTC6812-1" 64-eLQFP 2639.76,2408.46 r270 top

## Footprints (in the part's own frame and the unit in brackets; to place one, negate y for a bottom-side part, rotate by r counter-clockwise, add the part's x,y. Pads: shape width x height; smd on the part's side, far side on the other; paste and mask are expansions set on the pad)
1-84953-5 [mm] "15 way- FPC Connector"
  rect 0.61x2 smd: 1(-7,0) 2(-6,0) 3(-5,0) 4(-4,0) 5(-3,0) 6(-2,0) 7(-1,0) 8(0,0) 9(1,0) 10(2,0) 11(3,0) 12(4,0) 13(5,0) 14(6,0) 15(7,0)
  rect 2.68x3.6 smd: S(-9.99,-2.8) S(9.99,-2.8)
  silkscreen extent -11.46,-6.4 11.46,0.27, body extent -11.49,-6.42 11.42,0.13, height 2.59
3-84953-0 [mm] "30 way FPC Connector"
  rect 0.61x2 smd: 1(-14.5,0) 2(-13.5,0) 3(-12.5,0) 4(-11.5,0) 5(-10.5,0) 6(-9.5,0) 7(-8.5,0) 8(-7.5,0) 9(-6.5,0) 10(-5.5,0) 11(-4.5,0) 12(-3.5,0) 13(-2.5,0) 14(-1.5,0) 15(-0.5,0) 16(0.5,0) 17(1.5,0) 18(2.5,0) 19(3.5,0) 20(4.5,0) 21(5.5,0) 22(6.5,0) 23(7.5,0) 24(8.5,0) 25(9.5,0) 26(10.5,0) 27(11.5,0) 28(12.5,0) 29(13.5,0) 30(14.5,0)
  rect 2.68x3.6 smd: S1(-17.49,-2.8) S2(17.49,-2.8)
  silkscreen extent -18.96,-6.4 18.96,0.27, body extent -18.96,-6.55 18.96,0, height 2.59
64-eLQFP [mm]
  rect 1.3x0.25 smd: 1(-5.75,3.75) 2(-5.75,3.25) 3(-5.75,2.75) 4(-5.75,2.25) 5(-5.75,1.75) 6(-5.75,1.25) 7(-5.75,0.75) 8(-5.75,0.25) 9(-5.75,-0.25) 10(-5.75,-0.75) 11(-5.75,-1.25) 12(-5.75,-1.75) 13(-5.75,-2.25) 14(-5.75,-2.75) 15(-5.75,-3.25) 16(-5.75,-3.75) 33(5.75,-3.75) 34(5.75,-3.25) 35(5.75,-2.75) 36(5.75,-2.25) 37(5.75,-1.75) 38(5.75,-1.25) 39(5.75,-0.75) 40(5.75,-0.25) 41(5.75,0.25) 42(5.75,0.75) 43(5.75,1.25) 44(5.75,1.75) 45(5.75,2.25) 46(5.75,2.75) 47(5.75,3.25) 48(5.75,3.75)
  rect 0.25x1.3 smd: 17(-3.75,-5.75) 18(-3.25,-5.75) 19(-2.75,-5.75) 20(-2.25,-5.75) 21(-1.75,-5.75) 22(-1.25,-5.75) 23(-0.75,-5.75) 24(-0.25,-5.75) 25(0.25,-5.75) 26(0.75,-5.75) 27(1.25,-5.75) 28(1.75,-5.75) 29(2.25,-5.75) 30(2.75,-5.75) 31(3.25,-5.75) 32(3.75,-5.75) 49(3.75,5.75) 50(3.25,5.75) 51(2.75,5.75) 52(2.25,5.75) 53(1.75,5.75) 54(1.25,5.75) 55(0.75,5.75) 56(0.25,5.75) 57(-0.25,5.75) 58(-0.75,5.75) 59(-1.25,5.75) 60(-1.75,5.75) 61(-2.25,5.75) 62(-2.75,5.75) 63(-3.25,5.75) 64(-3.75,5.75)
  rect 5.74x5.74 smd: 65(0,0)
  silkscreen extent -5.24,-4.7 4.8,5.24, body extent -6,-6 6,6, height 1.46
0466.500NR [mm] "Surface Mount Fuses 63V .5A"
  rect 2.03x1.14 smd: 1(0,0) 2(0,2.67)
  silkscreen extent -1.3,-0.9 1.3,3.57, body extent -0.76,-0.29 0.76,2.89, height 0.58
ADG728 [mm]
  oval 1.25x0.35 smd: 1(-2.825,2.275) 2(-2.825,1.625) 3(-2.825,0.975) 4(-2.825,0.325) 5(-2.825,-0.325) 6(-2.825,-0.975) 7(-2.825,-1.625) 8(-2.825,-2.275) 9(2.825,-2.275) 10(2.825,-1.625) 11(2.825,-0.975) 12(2.825,-0.325) 13(2.825,0.325) 14(2.825,0.975) 15(2.825,1.625) 16(2.825,2.275)
  silkscreen extent -2.95,-2.55 1.8,3.12, body extent -2.25,-2.55 2.25,2.55, height 1.2
C_0603 [mm] "0603 Capacitor"
  rect 0.7x0.9 smd: 1(0,0) 2(1.5,0)
  silkscreen extent -0.6,-0.67 2.07,0.67, body extent -0.17,-0.5 1.57,0.45, height 0.88
FP-SOT23-MFG [mm]
  rect 0.7x0.6 smd paste-1000 mask+0: 1(-1,0.95) 2(-1,-0.95) 3(1,0)
  silkscreen extent -0.7,-1.5 0.7,1.5, body extent -1.5,-1.65 1.5,1.65, height 0.25
"LED (0603)" [mm]
  rect 0.8x0.75 smd: 1(-0.8,0) 2(0.8,0)
  silkscreen extent -1.83,-0.77 1.5,0.78, body extent -0.82,-0.4 0.78,0.4, height 0.41
R-0603 [mm] "0603 Resistor"
  rect 0.7x0.9 smd: 1(0,0) 2(1.5,0)
  silkscreen extent -0.6,-0.67 2.07,0.67, body extent -0.07,-0.43 1.53,0.43, height 0.52
R_2010 [mm]
  rect 1.5x3 smd: 1(-2.65,0) 2(2.65,0)
  silkscreen extent -3.7,-1.9 3.72,1.83, body extent -2.5,-1.25 2.5,1.25, height 0.61
R_2512 [mm] "2512 Resistor"
  rect 1.02x3.18 smd: 1(0,0) 2(6.35,0)
  silkscreen extent 1,-1.5 5.4,1.5, body extent 0.03,-1.63 6.37,1.63, height 0.62
SM91501ALE [mm] "2 Channel pulse transformer with choke"
  rect 1.02x1.715 smd: 1(0,0) 2(2,0) 3(4,0) 4(6,0) 5(8,0) 6(10,0) 7(10,13.785) 8(8,13.785) 9(6,13.785) 10(4,13.785) 11(2,13.785) 12(0,13.785)
  round 1 on Top Overlay mask+0: ""(-1.6,0.2)
  silkscreen extent -2.4,1.5 12.4,12.5, body extent -2.41,-0.56 12.4,14.17, height 5
TE_2-1445057-2 [mm]
  rect 1.27x2.92 smd: 1(1.5,5.48) 2(-1.5,5.48)
  rect 3.43x1.65 smd: P1(5.205,0) P2(-5.205,0)
  silkscreen extent -5,-5.58 5,5.58, body extent -6.62,-4.57 6.62,6.59, height 5.68
TO-252-3 [mm] "TO-252-3"
  rect 3x1.6 smd: 1(0,0) 3(0,4.57)
  rect 6.2x5.8 smd: 2(-7.18,2.285)
  silkscreen extent -1.91,-0.64 1.14,5.21, body extent -9.68,-1.06 0.67,5.64, height 2.42
"UWAM Logo" [mil] "UWAM Logo"
  silkscreen extent -946,-232 1016,83

## Part data
C1 C2 C3 C4 C5_BC1 C5_BC2 C5_BC3 C5_BC4 C5_BC5 C5_BC6 C5_BC7 C5_BC8 C5_BC9 C5_BC10 C5_BC11 C5_BC12 C5_BC13 C5_BC14 C6 C7 C8 C13 C14 C15 C17 C18 C19 C20 C21 C22_AFE1 C22_AFE2 C22_AFE3 C22_AFE4 C22_AFE5 C22_AFE6 C22_AFE7 C22_AFE8 C22_AFE9 C22_AFE10 C22_AFE11 C22_AFE12 C22_AFE13 C22_AFE14 C22_AFE15 C22_AFE16 C22_AFE17 C22_AFE18 C22_AFE19 C22_AFE20 C22_AFE21 C22_AFE22 C22_AFE23 C22_AFE24 C22_AFE25 C22_AFE26 C22_AFE27 C22_AFE28: library part Capacitor, "Capacitor", ComponentLink1Description="New link"
C9 C10 C11 C12: library part Capacitor, "Bypass caps", ComponentLink1Description="New link"
C16: library part Capacitor, "Capacitor", Voltage=100V, ComponentLink1Description="New link"
D1_BC1 D1_BC2 D1_BC3 D1_BC4 D1_BC5 D1_BC6 D1_BC7 D1_BC8 D1_BC9 D1_BC10 D1_BC11 D1_BC12 D1_BC13 D1_BC14 D3: "LED BLUE DIFFUSED 0603 SMD", Case/Package=0603, Color=Blue, Forward Voltage=3.2V, Manufacturer="Wurth Electronics", Supplier Part Number 1=710-150060BS55040, Test Current=20mA, ComponentLink1Description=http://www.farnell.com/datasheets/2621640.pdf?src-supplier=Farnell, ComponentLink1URL=http://www.farnell.com/datasheets/2621640.pdf?src-supplier=Farnell, ComponentLink2Description=https://www.we-online.de/web/en/index.php/download/media/07_electronic_components/download_center_1/application_notes_berichte/ano002_leds___the_future_of_horticultural_lighting/ANO002b_EN_LEDs_The_Future_of_Horticultural_Lighting.pdf?src-supplier=Digi-Key, ComponentLink2URL=https://www.we-online.de/web/en/index.php/download/media/07_electronic_components/download_center_1/application_notes_berichte/ano002_leds___the_future_of_horticultural_lighting/ANO002b_EN_LEDs_The_Future_of_Horticultural_Lighting.pdf?src-supplier=Digi-Key, ComponentLink3Description=https://katalog.we-online.de/pbs/datasheet/150060BS55040.pdf?src-supplier=Digi-Key, ComponentLink3URL=https://katalog.we-online.de/pbs/datasheet/150060BS55040.pdf?src-supplier=Digi-Key, ComponentLink4Description=http://www.farnell.com/datasheets/2621640.pdf?src-supplier=Newark, ComponentLink4URL=http://www.farnell.com/datasheets/2621640.pdf?src-supplier=Newark, Dominant Wavelength=470nm, Height=0.5mm, Length=1.6mm, Lens Size=0.8mm, Lens Style=Flat, Lens Transparency=Diffused, Luminous Intensity=80mcd, Manufacturer Part Number=150060BS55040, Mount="Surface Mount", Packaging="Tape and Reel", Pricing 1="1=0.18000, 10=0.16800, 50=0.16800, 100=0.15200, 1000=0.12100, 10000=0.10600 (USD)", RoHS=No, RoHS Compliant=No, Supplier 1=Mouser, Viewing Angle=140°, Width=0.8mm
D2: "LED RED DIFFUSED 0603 SMD", Case Code (Imperial)=0603, Case Code (Metric)=1608, Color=Red, Forward Voltage=2V, Manufacturer="Wurth Electronics", Supplier Part Number 1=710-150060SS55040, Test Current=20mA, Case/Package=0603, Category=LEDs, Dominant Wavelength=630nm, Height=0.5mm, Length=1.6mm, Lens Size=0.8mm, Lens Style=Flat, Lens Transparency=Diffused, Luminous Intensity=70mcd, Manufacturer Part Number=150060SS55040, Mount="Surface Mount", Packaging="Tape and Reel", Pricing 1="1=0.18000, 10=0.16800, 50=0.16800, 100=0.15200, 1000=0.12100, 10000=0.10600 (USD)", RoHS=No, RoHS Compliant=No, Stock 1=17006, Supplier 1=Mouser, Viewing Angle=140°, Width=0.8mm
D4: "LED GREEN DIFFUSED 0603 SMD", Case Code (Imperial)=0603, Case Code (Metric)=1608, Color=Green, Forward Voltage=3.2V, Manufacturer="Wurth Electronics", Supplier Part Number 1=710-150060GS55040, Test Current=20mA, Case/Package=0603, Category=LEDs, ComponentLink1Description=http://www.farnell.com/datasheets/2621642.pdf?src-supplier=Farnell, ComponentLink1URL=http://www.farnell.com/datasheets/2621642.pdf?src-supplier=Farnell, ComponentLink2Description=http://katalog.we-online.de/pbs/datasheet/150060GS55040.pdf?src-supplier=Digi-Key, ComponentLink2URL=http://katalog.we-online.de/pbs/datasheet/150060GS55040.pdf?src-supplier=Digi-Key, ComponentLink3Description=https://www.we-online.de/web/en/index.php/download/media/07_electronic_components/download_center_1/application_notes_berichte/ano002_leds___the_future_of_horticultural_lighting/ANO002b_EN_LEDs_The_Future_of_Horticultural_Lighting.pdf?src-supplier=Digi-Key, ComponentLink3URL=https://www.we-online.de/web/en/index.php/download/media/07_electronic_components/download_center_1/application_notes_berichte/ano002_leds___the_future_of_horticultural_lighting/ANO002b_EN_LEDs_The_Future_of_Horticultural_Lighting.pdf?src-supplier=Digi-Key, ComponentLink4Description=https://katalog.we-online.de/pbs/datasheet/150060GS55040.pdf?src-supplier=Digi-Key, ComponentLink4URL=https://katalog.we-online.de/pbs/datasheet/150060GS55040.pdf?src-supplier=Digi-Key, ComponentLink5Description=http://www.farnell.com/datasheets/2621642.pdf?src-supplier=Newark, ComponentLink5URL=http://www.farnell.com/datasheets/2621642.pdf?src-supplier=Newark, Dominant Wavelength=525nm, Height=0.5mm, Length=1.6mm, Lens Size=0.8mm, Lens Style=Flat, Lens Transparency=Diffused, Luminous Intensity=430mcd, Manufacturer Part Number=150060GS55040, Mount="Surface Mount", Packaging="Cut Tape", Pricing 1="1=0.23000, 10=0.21000, 50=0.21000, 100=0.19000, 1000=0.15200, 10000=0.13200 (USD)", RoHS=No, RoHS Compliant=No, Stock 1=3998, Supplier 1=Mouser, Viewing Angle=140°, Width=0.8mm
F1_BC1 F1_BC2 F1_BC3 F1_BC4 F1_BC5 F1_BC6 F1_BC7 F1_BC8 F1_BC9 F1_BC10 F1_BC11 F1_BC12 F1_BC13 F1_BC14 F2 F3: library part "Fuse 2", "LITTELFUSE - 0466.500NR - Fuse, Surface Mount, 500 mA, 466 Series, 63 VAC, 63 VDC, Very Fast Acting, 1206", Case Code (Imperial)=1206, Case Code (Metric)=3216, Current Rating=500mA, DC Cold Resistance=248mR, Manufacturer=Littelfuse, Max Operating Temperature=90°C, Min Operating Temperature=-55°C, Package Quantity=5000, Resistance=350mR, Supplier Part Number 1=576-0466.500NR, Voltage Rating=63V, Approvals=UL,CSA, Body Material=Thermoplastic, Case/Package=1206, Category=Fuses, ComponentLink1Description=https://datasheet.ciiva.com/17081/0466-500nr-17081083.pdf?src-supplier=Allied+Electronics, ComponentLink1URL=https://datasheet.ciiva.com/17081/0466-500nr-17081083.pdf?src-supplier=Allied+Electronics, ComponentLink2Description=https://datasheet.ciiva.com/16327/littelfuse-fuse-466-16327478.pdf?src-supplier=Future+Electronics, ComponentLink2URL=https://datasheet.ciiva.com/16327/littelfuse-fuse-466-16327478.pdf?src-supplier=Future+Electronics, ComponentLink3Description=https://datasheet.ciiva.com/299/466seriesdrawing-299207.pdf?src-supplier=Digi-Key, ComponentLink3URL=https://datasheet.ciiva.com/299/466seriesdrawing-299207.pdf?src-supplier=Digi-Key, ComponentLink4Description=https://datasheet.ciiva.com/299/466seriesdrawing-299208.pdf?src-supplier=Digi-Key, ComponentLink4URL=https://datasheet.ciiva.com/299/466seriesdrawing-299208.pdf?src-supplier=Digi-Key, ComponentLink5Description=https://datasheet.ciiva.com/299/466seriesdrawing-299209.pdf?src-supplier=Digi-Key, ComponentLink5URL=https://datasheet.ciiva.com/299/466seriesdrawing-299209.pdf?src-supplier=Digi-Key, ComponentLink6Description=https://datasheet.ciiva.com/14102/ei466-dat-e-14102891.pdf?src-supplier=Distrelec, ComponentLink6URL=https://datasheet.ciiva.com/14102/ei466-dat-e-14102891.pdf?src-supplier=Distrelec, ComponentLink7Description=https://datasheet.ciiva.com/15186/getdatasheetpartid-57351-15186924.pdf?src-supplier=Verical, ComponentLink7URL=https://datasheet.ciiva.com/15186/getdatasheetpartid-57351-15186924.pdf?src-supplier=Verical, Depth=1.52mm, Fuse Current=500mA, Fuse Type="Board Mount (Cartridge Style Excluded)", Height=0.023inch, Housing Material=Ceramic, LatestRevisionDate=17-Jul-2002, LatestRevisionNote="Re-released for DXP Platform.", Lead Free="Lead Free", Length=3.18mm, Manufacturer Part Number=0466.500NR, Mount="Surface Mount", Number of Pins=2, PackageDescription="Thru-Hole; 2 Leads", PackageReference=PIN-W2/E2.8, Packaging="Tape and Reel", Pricing 1="1=0.77000, 10=0.59200, 50=0.59200, 100=0.48900, 1000=0.41600, 10000=0.39000 (USD)", Published=8-Jun-2000, Publisher="Altium Limited", Radiation Hardening=No, REACH SVHC=Unknown, RoHS=Yes, RoHS Compliant=Yes, Series=466, Stock 1=36497, Supplier 1=Mouser, Terminal Material=Copper, Termination=SMD/SMT, Voltage Rating (AC)=63V, Voltage Rating (DC)=63V, Width=0.06inch, Working Voltage=63V
J1: "CONN FPC TOP 30POS 1.00MM R/A", Actuator Color=Black, Color=Natural, Contact Current Rating=1A, Contact Resistance=10mR, Flammability Rating="UL94 V-0", Manufacturer="TE Connectivity", Max Operating Temperature=85°C, Max Voltage Rating (AC)=200V, Min Operating Temperature=-40°C, Package Quantity=1200, Supplier Part Number 1=571-3-84953-0, Actuator Material=Nylon,Glass,Polyamide, Body Plating=Tin, Category="FFC / FPC", ComponentLink1Description=https://datasheet.ciiva.com/11745/0900766b806d28d6-11745122.pdf?src-supplier=RSComponents, ComponentLink1URL=https://datasheet.ciiva.com/11745/0900766b806d28d6-11745122.pdf?src-supplier=RSComponents, ComponentLink2Description=https://datasheet.ciiva.com/1437/eng-cd-84953-a3-1437863.pdf?src-supplier=Element14, ComponentLink2URL=https://datasheet.ciiva.com/1437/eng-cd-84953-a3-1437863.pdf?src-supplier=Element14, ComponentLink3Description=https://datasheet.ciiva.com/1437/eng-cd-84953-a3-1437862.pdf?src-supplier=Element14, ComponentLink3URL=https://datasheet.ciiva.com/1437/eng-cd-84953-a3-1437862.pdf?src-supplier=Element14, ComponentLink4Description=https://datasheet.ciiva.com/5750/586796-5750949.pdf?src-supplier=Farnell, ComponentLink4URL=https://datasheet.ciiva.com/5750/586796-5750949.pdf?src-supplier=Farnell, ComponentLink5Description=https://datasheet.ciiva.com/10034/eng-ds-1-1773440-6-0506-10034394.pdf?src-supplier=Avnet, ComponentLink5URL=https://datasheet.ciiva.com/10034/eng-ds-1-1773440-6-0506-10034394.pdf?src-supplier=Avnet, ComponentLink6Description=https://datasheet.ciiva.com/30052/eng-ds-1-1773440-6-0506-30052600.pdf?src-supplier=Onlinecomponents.com, ComponentLink6URL=https://datasheet.ciiva.com/30052/eng-ds-1-1773440-6-0506-30052600.pdf?src-supplier=Onlinecomponents.com, ComponentLink7Description=https://datasheet.ciiva.com/669/eng-cd-84953-a3-669167.pdf?src-supplier=Digi-Key, ComponentLink7URL=https://datasheet.ciiva.com/669/eng-cd-84953-a3-669167.pdf?src-supplier=Digi-Key, ComponentLink8Description=https://datasheet.ciiva.com/669/eng-cd-84953-a3-669168.pdf?src-supplier=Digi-Key, ComponentLink8URL=https://datasheet.ciiva.com/669/eng-cd-84953-a3-669168.pdf?src-supplier=Digi-Key, ComponentLink9Description=https://datasheet.ciiva.com/669/eng-cd-84953-a3-669166.pdf?src-supplier=Digi-Key, ComponentLink9URL=https://datasheet.ciiva.com/669/eng-cd-84953-a3-669166.pdf?src-supplier=Digi-Key, Connector System=Flex-to-Board, Connector Type=Receptacle,Connector,Socket, Contact Location=Top, Contact Material=Bronze, Contact Plating=Tin,Bright, Current Rating=1A, Depth=7.3mm, ELV=Compliant, Gender=Female, Height=2.56mm, Housing Color=Natural, Housing Material=Polymer, Insulation=Non-Insulated, Lead Pitch=1mm, Length=37.92mm, Manufacturer Part Number=3-84953-0, Material=Thermoplastic, Mating Alignment="Yes (With)", Mount="Surface Mount,Through Hole", Number of Contacts=30, Number of Positions=30, Number of Rows=1, Orientation="Right Angle", Packaging="Tape and Reel", PCB Mount Alignment="No (Without)", PCB Mount Retention=With, PCB Mounting Orientation="Right Angle", Pin Diameter=0.2mm, Pitch=0.039inch, Plating Thickness=2um, Pricing 1="1=1.65000, 10=1.41000, 50=1.41000, 100=1.22000, 500=1.07000, 1000=1.07000, 1200=0.91500, 2400=0.87100, 10000=0.87100 (USD)", Radiation Hardening=No, REACH SVHC="No SVHC", RoHS=Yes, Sealable="No (Without)", Series=-, Shielding=Unshielded, Shrouded="Yes (With)", Stock 1=14380, Supplier 1=Mouser, Termination=SMD/SMT, Voltage Rating=200V, Width=0.2575inch, Wire/Cable Type="Flat Flex"
J2: "Conn FPC Connector SKT 15 POS 1mm Solder RA SMD T/R", Contact Current Rating=1A, Housing Color=Natural, Manufacturer="TE Connectivity", Max Operating Temperature=85°C, Max Voltage Rating (AC)=200V, Min Operating Temperature=-40°C, Package Quantity=1200, Supplier Part Number 1=571-1-84953-5, Category="FFC / FPC", ComponentLink1Description=https://datasheet.ciiva.com/669/eng-cd-84953-a3-669110.pdf?src-supplier=Digi-Key, ComponentLink1URL=https://datasheet.ciiva.com/669/eng-cd-84953-a3-669110.pdf?src-supplier=Digi-Key, ComponentLink2Description=https://datasheet.ciiva.com/669/eng-cd-84953-a3-669111.pdf?src-supplier=Digi-Key, ComponentLink2URL=https://datasheet.ciiva.com/669/eng-cd-84953-a3-669111.pdf?src-supplier=Digi-Key, ComponentLink3Description=https://datasheet.ciiva.com/16660/eng-ds-1-1773440-6-0506-16660135.pdf?src-supplier=Avnet+Europe, ComponentLink3URL=https://datasheet.ciiva.com/16660/eng-ds-1-1773440-6-0506-16660135.pdf?src-supplier=Avnet+Europe, ComponentLink4Description=https://datasheet.ciiva.com/669/eng-cd-84953-a3-669112.pdf?src-supplier=Digi-Key, ComponentLink4URL=https://datasheet.ciiva.com/669/eng-cd-84953-a3-669112.pdf?src-supplier=Digi-Key, Connector System=Flex-to-Board, Connector Type=Receptacle,Connector,Socket, Contact Location=Top, Contact Material=Bronze, Contact Plating=Tin,Bright, Current Rating=1A, Depth=7.3mm, ELV=Compliant, Gender=Receptacle, Height=2.56mm, Housing Material=Polymer, Length=22.92mm, Manufacturer Part Number=1-84953-5, Mating Alignment="Yes (With)", Mount="Surface Mount", Number of Contacts=15, Number of Positions=15, Number of Rows=1, Orientation="Right Angle", Packaging="Tape and Reel", PCB Mount Alignment="No (Without)", PCB Mount Retention=With, PCB Mounting Orientation="Right Angle", Pitch=0.039inch, Plating Thickness=2um, Pricing 1="1=1.07000, 10=0.87800, 50=0.87800, 100=0.76700, 500=0.65900, 1000=0.65900, 1200=0.58600, 2400=0.53000, 4800=0.51200, 9600=0.48600, 10000=0.48600, 24000=0.47500 (USD)", Radiation Hardening=No, RoHS=Yes, Sealable="No (Without)", Shielding=Unshielded, Shrouded="Yes (With)", Stock 1=7302, Supplier 1=Mouser, Termination=SMD/SMT, Voltage Rating=200V, Width=0.2575inch, Wire/Cable Type="Flat Flex"
J4: "CONN HEADER 3MM 2POS R/A TIN SMD--", Package=None, Availability=Unavailable, MF="{'manufacturer': u'TE Connectivity'}", MP=2-1445057-2, Price=None
J5: "CONN HEADER 3MM 2POS R/A TIN SMD", Package=None, Availability=Unavailable, MF="{'manufacturer': u'TE Connectivity'}", MP=2-1445057-2, Price=None
Q1_BC1 Q1_BC2 Q1_BC3 Q1_BC4 Q1_BC5 Q1_BC6 Q1_BC7 Q1_BC8 Q1_BC9 Q1_BC10 Q1_BC11 Q1_BC12 Q1_BC13 Q1_BC14: library part CMP-14409-000018-1, "MOSFET P-CH 20V 2A TO-236AB"
Q2: "ON SEMICONDUCTOR   MJD340G   Bipolar (BJT) Single Transistor, General Purpose, NPN, 300 V, 15 W, 500 mA, 240", Case/Package=DPAK, Collector Base Voltage (VCBO)=300V, Collector Emitter Saturation Voltage=1V, Current Rating=500mA, Emitter Base Voltage (VEBO)=3V, Manufacturer="ON Semiconductor", Max Frequency=10MHz, Max Operating Temperature=150°C, Max Power Dissipation=15W, Min Operating Temperature=-65°C, Package Quantity=75, Power Dissipation=1.56W, Supplier Part Number 1=7905343, Category=BJTs, Collector Emitter Breakdown Voltage=300V, Collector Emitter Voltage (VCEO)=300V, Collector-emitter Voltage-Max=300V, ComponentLink1Description=https://datasheet.ciiva.com/4721/mjd340-d-112116-4721347.pdf?src-supplier=Mouser, ComponentLink1URL=https://datasheet.ciiva.com/4721/mjd340-d-112116-4721347.pdf?src-supplier=Mouser, ComponentLink2Description=https://datasheet.ciiva.com/15138/getdatasheetpartid-41077-15138708.pdf?src-supplier=Verical, ComponentLink2URL=https://datasheet.ciiva.com/15138/getdatasheetpartid-41077-15138708.pdf?src-supplier=Verical, ComponentLink3Description=https://datasheet.ciiva.com/18429/70100598-18429461.pdf?src-supplier=Allied+Electronics, ComponentLink3URL=https://datasheet.ciiva.com/18429/70100598-18429461.pdf?src-supplier=Allied+Electronics, ComponentLink4Description=https://datasheet.ciiva.com/977/mjd340-d-977159.pdf?src-supplier=Digi-Key, ComponentLink4URL=https://datasheet.ciiva.com/977/mjd340-d-977159.pdf?src-supplier=Digi-Key, ComponentLink5Description=https://datasheet.ciiva.com/11201/mjd340-d-11201899.pdf?src-supplier=Avnet, ComponentLink5URL=https://datasheet.ciiva.com/11201/mjd340-d-11201899.pdf?src-supplier=Avnet, ComponentLink6Description=https://datasheet.ciiva.com/7972/mjd340-d-7972285.pdf?src-supplier=Element14, ComponentLink6URL=https://datasheet.ciiva.com/7972/mjd340-d-7972285.pdf?src-supplier=Element14, ComponentLink7Description=https://datasheet.ciiva.com/16462/mjd340-d-16462206.pdf?src-supplier=Future+Electronics, ComponentLink7URL=https://datasheet.ciiva.com/16462/mjd340-d-16462206.pdf?src-supplier=Future+Electronics, Contact Plating=Tin,Matte, Element Configuration=Single, Height=0.094inch, hFE Min=30, Lead Free="Lead Free", Length=0.264inch, Manufacturer Part Number=MJD340G, Max Collector Current=500mA, Number of Elements=1, Number of Pins=3, Packaging=Rail/Tube, Polarity=NPN, Pricing 1="15=0.60500 (USD)", Radiation Hardening=No, REACH SVHC="No SVHC", RoHS=Yes, RoHS Compliant=Yes, Series=-, Stock 1=1, Supplier 1=RSComponents, Transition Frequency=10MHz, Voltage Rating (DC)=300V, Width=0.245inch
R5_BC1 R5_BC2 R5_BC3 R5_BC4 R5_BC5 R5_BC6 R5_BC7 R5_BC8 R5_BC9 R5_BC10 R5_BC11 R5_BC12 R5_BC13 R5_BC14: library part Resistor, "Balance Resistor", Supplier Part Number 1=71-CRCW251221R0FKEGH, Supplier 1=Mouser